# Altium PCB YoRadio108.PcbDoc
Units mm, origin at the board's own origin, x right, y up, seen from the top; angles counter-clockwise.
Board outline 153.07 x 123.13 mm, 2 copper layers (Top Layer, Bottom Layer); 46 components, 46 nets, 178 pads, 15 vias.
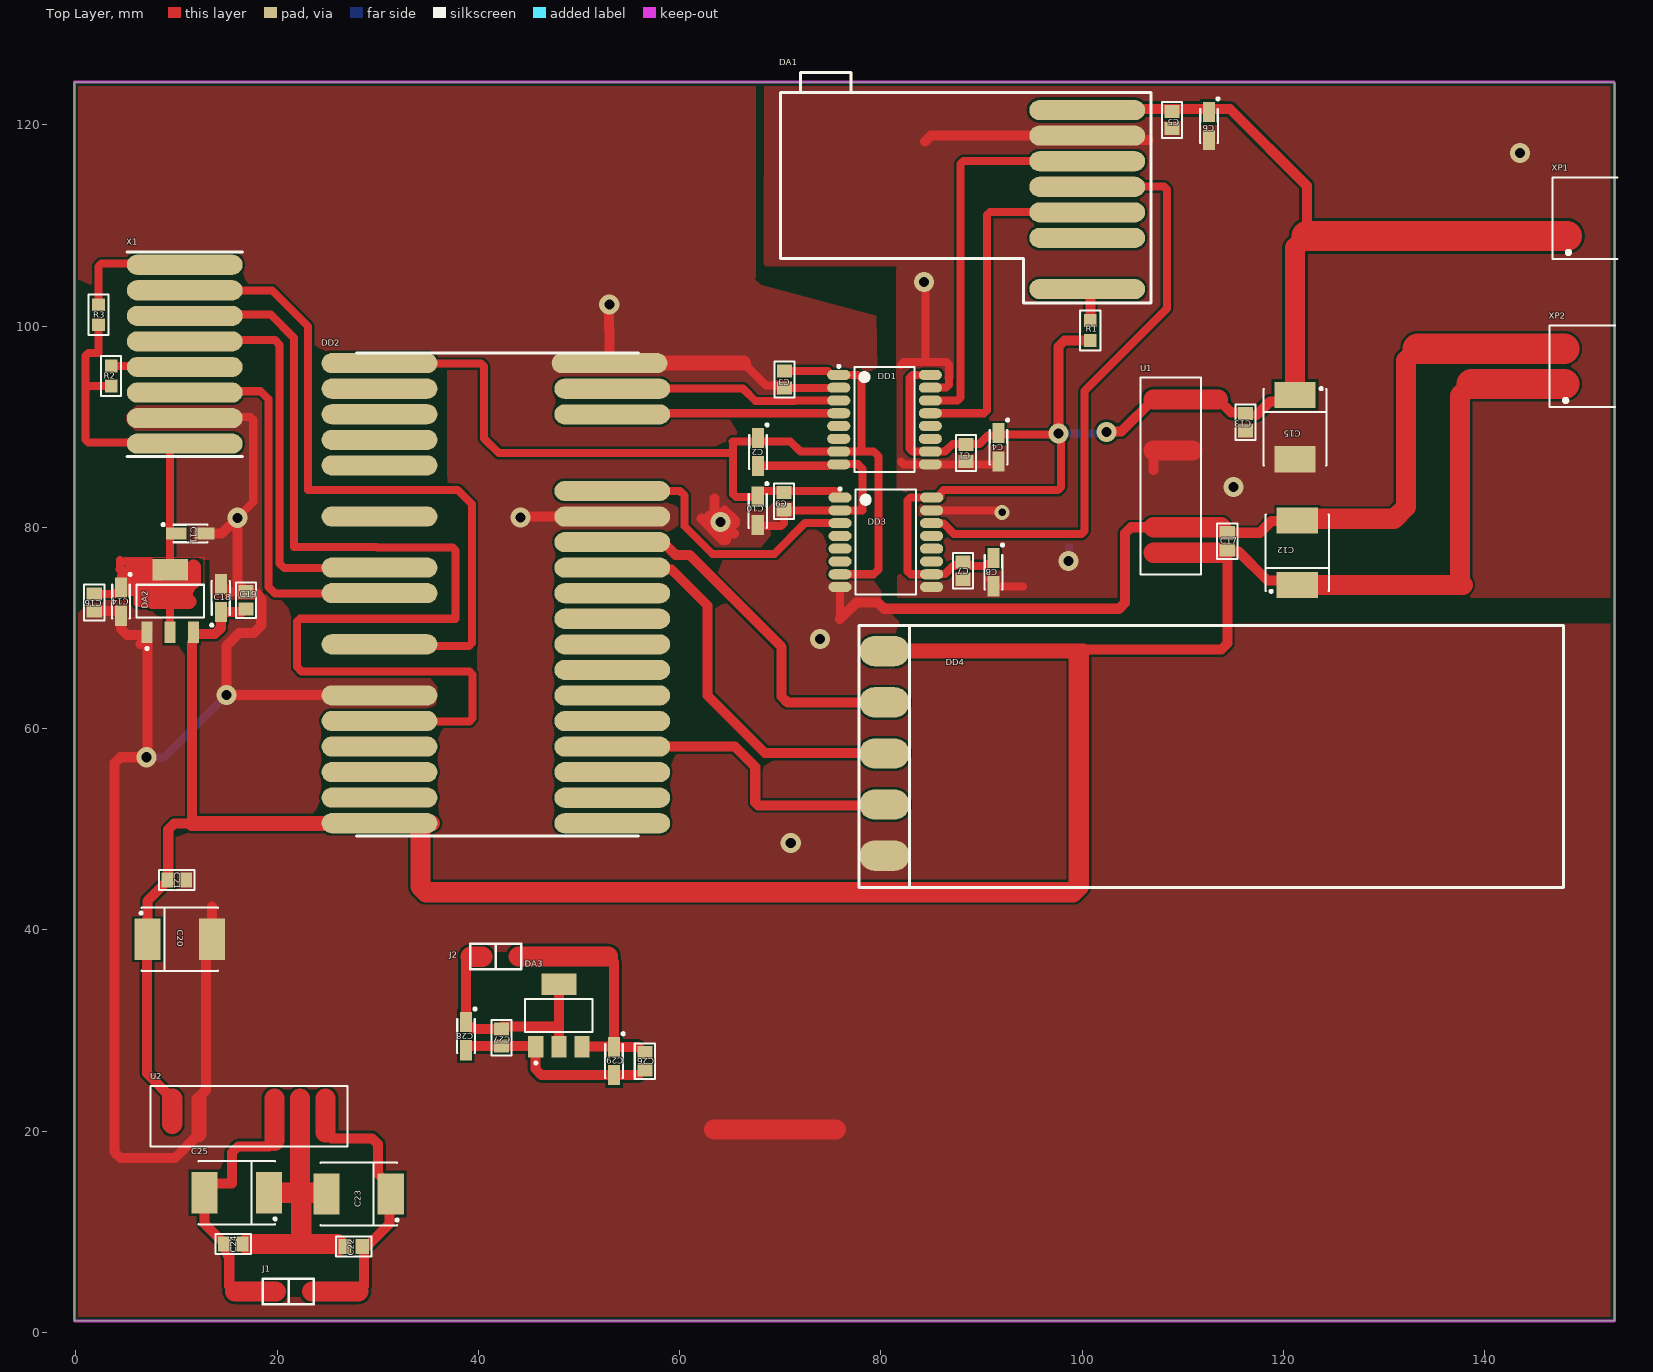
[diagram p0: Top Layer view]
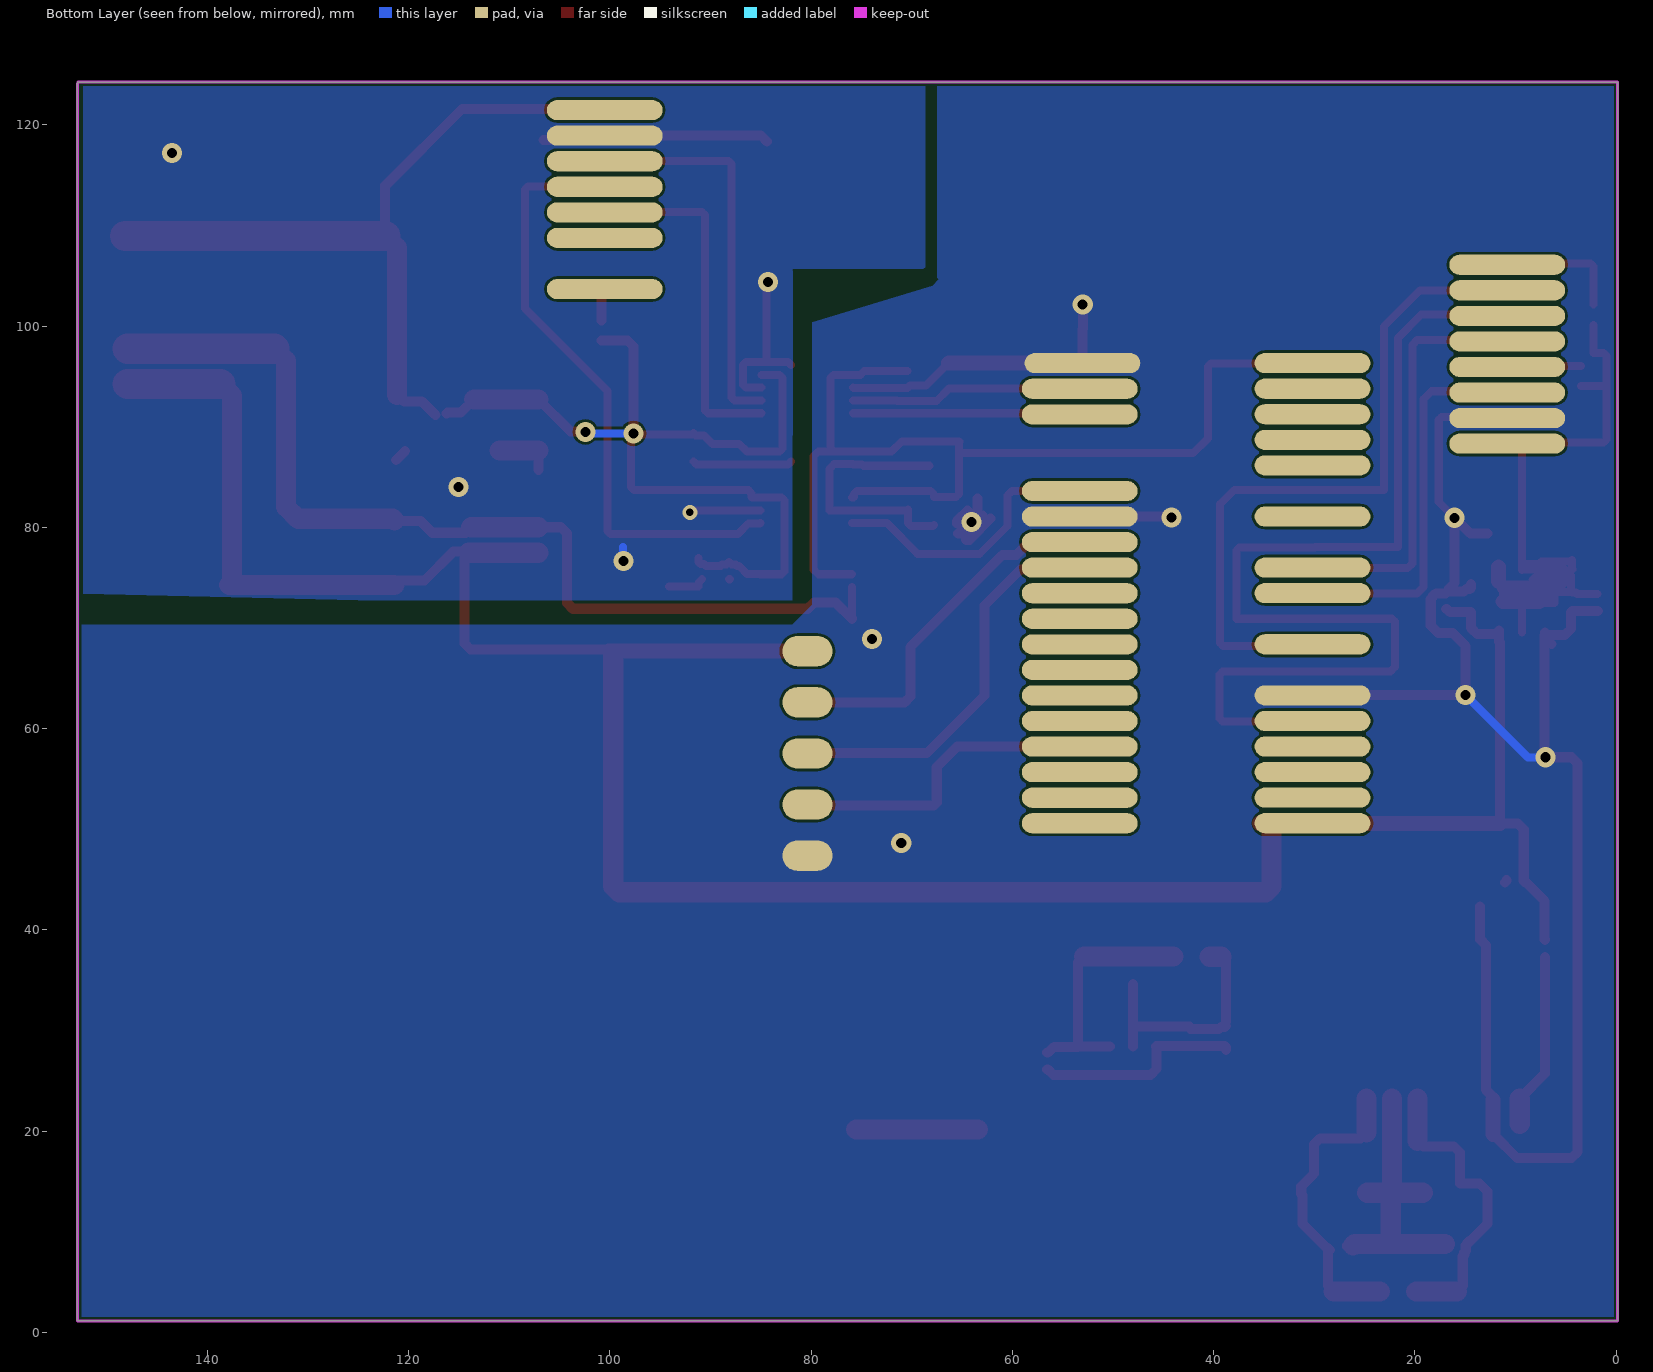
[diagram p1: Bottom Layer view, seen from below]

## Layer stack, top to bottom
Top Solder: solder mask 0.0102, Solder Resist, Dk 3.5
Top Layer: signal copper 0.0356
Dielectric 1: dielectric 0.32, FR-4, Dk 4.8
Bottom Layer: signal copper 0.0356
Bottom Solder: solder mask 0.0102, Solder Resist, Dk 3.5

## Board outline
-0.16,1.143 152.908,1.143 152.908,1.13 152.908,124.13 152.865,124.257 -0.135,124.257 -0.16,124.231

## Design rules (kind name [scope] priority, off if disabled: settings)
Clearance [All] p1: gap=0.254 ignorepadtopadclearanceinfootprint=FALSE
ComponentClearance [All] p1: gap=0 collisioncheckmode=3 verticalgap=2540 showdistances=TRUE donotcheckwithout3dbody=TRUE checkcomponentboundary=TRUE
PolygonConnect [All] p1: connectstyle=Direct reliefconductorwidth=0.254 reliefentries=4 polygonreliefangle="90 Angle" airgapwidth=0.254
RoutingCorners [All] p1: cornerstyle=90-Degree minsetback=0 maxsetback=0
RoutingVias [All] p1: holewidth=1 width=2 viastyle="Through Hole" minholewidth=0 minwidth=0 maxholewidth=20 maxwidth=20
SolderMaskExpansion [All] p1: expansion=0.102 istentingtop=FALSE
SupplyNets "Schematic Supply Nets_1" [InNet('GNDA')] p1: voltage=0.000
SupplyNets "Schematic Supply Nets" [InNet('GND')] p2: voltage=0.000
UnRoutedNet [All] p1: checkbadconnections=TRUE
UnpouredPolygon [All] p1: allowunpoured=TRUE
Width [All] p1: maxlimit=8 minlimit=0.254 preferedwidth=0.5
26 further rules are at their usual default settings.

## Components (designator, comment, footprint, x,y, rotation, side; value= is the part's Value field where it differs from the comment)
C1 "0.1uF" cap0805 88.443,87.376 r270 top
C2 "6.8uF" TC3216-1206-A 67.793,87.478 r270 top
C3 "0.1uF" cap0805 70.409,94.691 r270 top
C4 "6.8uF" TC3216-1206-A 91.694,87.96 r270 top
C5 "0.1uF" cap0805 108.941,120.472 r270 top
C6 "6.8uF" TC3216-1206-A 112.598,119.888 r270 top
C7 "0.1uF" cap0805 88.163,75.692 r270 top
C8 "6.8uF" TC3216-1206-A 91.186,75.54 r270 top
C9 "0.1uF" cap0805 70.358,82.601 r270 top
C10 "6.8uF" TC3216-1206-A 67.767,81.636 r270 top
C11 "6.8uF" TC3216-1206-A 11.379,79.375 r0 top
C12 "" TC7360-2924-E 121.387,77.47 r90 top
C13 "0.1uF" cap0805 116.23,90.449 r270 top
C14 "6.8uF" TC3216-1206-A 4.496,72.619 r270 top
C15 "100uF" TC7360-2924-E 121.158,89.967 r270 top
C16 "0.1uF" cap0805 1.829,72.542 r270 top
C17 "0.1uF" cap0805 114.427,78.613 r90 top
C18 "6.8uF" TC3216-1206-A 14.402,72.974 r90 top
C19 "*" cap0805 16.916,72.746 r90 top
C20 "" TC7360-2924-E 10.312,39.065 r0 top
C21 "0.1uF" cap0805 10.033,44.958 r0 top
C22 "0.1uF" cap0805 27.61,8.542 r180 top
C23 "100uF" TC7360-2924-E 28.092,13.749 r180 top
C24 "0.1uF" cap0805 15.646,8.771 r180 top
C25 "100uF" TC7360-2924-E 15.977,13.876 r180 top
C26 "0.1uF" cap0805 56.54,26.949 r270 top
C27 "0.1uF" cap0805 42.291,29.286 r270 top
C28 "6.8uF" TC3216-1206-A 38.76,29.439 r270 top
C29 "6.8uF" TC3216-1206-A 53.492,26.975 r270 top
DA1 "PCM5102" PCM5102 70.028,106.858 r0 top
DA2 "LM1117MP-3.3" SOT223#1 9.373,72.669 r0 top
DA3 "LM1117MP-3.3" SOT223#2 48.006,31.496 r0 top
DD1 "ADUM1402ARW" WSO-16 80.366,90.703 r0 top
DD2 "Wrover38" Wrover 28.905,96.317 r0 top
DD3 "ADUM1402ARW" WSO-16 80.493,78.511 r0 top
DD4 "RS-485" RS-485 77.826,70.231 r0 top
J1 "PLS-2" PLS-2 21.133,4.046 r270 top
J2 "PLS-2" PLS-2 41.707,37.363 r90 top
R1 "10k" res0805 100.813,99.568 r90 top
R2 "100" res0805 3.505,95.047 r90 top
R3 "100" res0805 2.235,101.127 r90 top
U1 "AM1D-0505SH30N" AM1D_3kV#1 107.086,77.47 r90 top
U2 "AM1D-0505SH30N" AM1D_3kV#2 9.576,23.223 r0 top
X1 "PBD-16" TFT 10.82,106.096 r0 top
XP1 "15EDGRC-3.5-02P" 15EDGRC-3.5-02P 154.229,114.757 r270 top
XP2 "15EDGRC-3.5-02P" 15EDGRC-3.5-02P 153.949,100.051 r270 top

## Footprints (in the part's own frame and the unit in brackets; to place one, negate y for a bottom-side part, rotate by r counter-clockwise, add the part's x,y. Pads: shape width x height; smd on the part's side, far side on the other; paste and mask are expansions set on the pad)
15EDGRC-3.5-02P [mm]
  rect 0x2 all layers, no hole: 1(5.8,-6)
  oval 0x2 all layers, no hole: 2(2.3,-6)
  silkscreen extent 0,-7.5 8.1,-1, body extent 0.15,-7.25 7.95,1.95, height 7.21
AM1D_3kV#1 [mm]
  rect 0x1.6 all layers, no hole: 1(0,0)
  oval 0x1.6 all layers, no hole: 2(2.54,0) 3(10.16,0) 4(12.7,0) 5(15.24,0)
  silkscreen extent -2.15,-4.75 17.4,1.27
AM1D_3kV#2 [mm]
  rect 0x0 all layers, no hole: 1(0,0)
  round 0 all layers, no hole: 2(2.54,0) 3(10.16,0) 4(12.7,0) 5(15.24,0)
  silkscreen extent -2.15,-4.75 17.4,1.27
cap0805 [mm]
  rect 1.3x1.5 smd: 1(-0.85,0) 2(0.85,0)
  silkscreen extent -1.78,-1 1.78,1
PCM5102 [mm]
  oval 11.5x2 all layers, no hole: 1(30.48,14.605) 2(30.48,12.065) 3(30.48,9.525) 4(30.48,6.985) 5(30.48,4.445) 6(30.48,1.905) 7(30.48,-3.175)
  silkscreen extent -0.02,-4.57 36.83,18.36
PLS-2 [mm]
  rect 0x1.6 all layers, no hole: 1(0,-1.27)
  oval 0x1.6 all layers, no hole: 2(0,1.27)
  silkscreen extent -1.27,-2.54 1.27,2.53
res0805 [mm]
  rect 1.27x1.27 smd: 1(-1,0) 2(1,0)
  silkscreen extent -2,-1 2,1
RS-485 [mm]
  oval 5x3 all layers, no hole: 1(2.54,-2.54) 2(2.54,-7.62) 3(2.54,-12.7) 4(2.54,-17.78) 5(2.54,-22.86)
  silkscreen extent 0,-26 70,0
SOT223#1 [mm] "SOT-223/SC-73; 4 Leads; Body 6.7 x 7.3 mm, inc. leads (LxW max)"
  rect 1.1x2.15 smd: 1(-2.3,-3.1) 2(0,-3.1) 3(2.3,-3.1)
  rect 3.5x2.15 smd: 4(0,3.1)
  silkscreen extent -3.35,-4.85 3.35,1.63
SOT223#2 [mm] "SOT-223/SC-73; 4 Leads; Body 6.7 x 7.3 mm, inc. leads (LxW max)"
  rect 1.5x2.15 smd: 1(-2.3,-3.1) 2(0,-3.1) 3(2.3,-3.1)
  rect 3.5x2.15 smd: 4(0,3.1)
  silkscreen extent -3.35,-4.85 3.35,1.63
TC3216-1206-A [mm] "Capacitor, SM Tantalum; Body 3.2 x 1.6 mm (LxW typ)"
  rect 2x1.2 smd: 1(-1.4,0) 2(1.4,0)
  silkscreen extent -2.82,-0.9 1.7,1.03
TC7360-2924-E [mm] "Capacitor, SM Tantalum; Body 7.3 x 6.0 mm (LxW typ)"
  rect 2.6x4.1 smd: 1(-3.2,0) 2(3.2,0)
  silkscreen extent -3.95,-3.15 3.8,3.15, body extent -3.65,-2.15 3.65,2.15, height 4.12
TFT [mm]
  oval 11.5x2 all layers, no hole: 1(0,-17.78) 3(0,-15.24) 5(0,-12.7) 7(0,-10.16) 9(0,-7.62) 11(0,-5.08) 13(0,-2.54) 15(0,0)
  silkscreen extent -5.71,-19.05 5.71,1.27
Wrover [mm]
  oval 11.5x2 all layers, no hole: 1(1.27,0) 2(1.27,-2.54) 3(1.27,-5.08) 4(1.27,-7.62) 5(1.27,-10.16) 7(1.27,-15.24) 9(1.27,-20.32) 10(1.27,-22.86) 12(1.27,-27.94) 14(1.27,-33.02) 15(1.27,-35.56) 16(1.27,-38.1) 17(1.27,-40.64) 18(1.27,-43.18) 19(1.27,-45.72) 20(24.399,-45.725) 21(24.399,-43.185) 22(24.399,-40.645) 23(24.399,-38.105) 24(24.399,-35.565) 25(24.399,-33.025) 26(24.399,-30.485) 27(24.399,-27.945) 28(24.399,-25.405) 29(24.399,-22.865) 30(24.399,-20.325) 31(24.399,-17.785) 32(24.399,-15.245) 33(24.399,-12.705) 36(24.399,-5.085) 37(24.399,-2.545) 38(24.13,0)
  oval 0x2 all layers, no hole: 6(1.27,-12.7) 8(1.27,-17.78) 11(1.27,-25.4) 13(1.27,-30.48)
  silkscreen extent -1,-47 27,1
WSO-16 [mm] "20-Pin Small Outline Integrated Circuit (SOIC20), IPC Medium Density"
  oval 2.3x1 smd: 1(-4.55,4.445) 2(-4.55,3.175) 3(-4.55,1.905) 4(-4.55,0.635) 5(-4.55,-0.635) 6(-4.55,-1.905) 7(-4.55,-3.175) 8(-4.55,-4.445) 9(4.55,-4.445) 10(4.55,-3.175) 11(4.55,-1.905) 12(4.55,-0.635) 13(4.55,0.635) 14(4.55,1.905) 15(4.55,3.175) 16(4.55,4.445)
  silkscreen extent -4.67,-5.21 3,5.42, body extent -5.31,-5.25 5.31,5.25, height 2.62

## Part data
C1 C3 C5 C7 C9 C13 C16 C17 C19 C21 C22 C24 C26 C27: library part cap0805, "Керамический конденсатор, SMD", Package="SMD 0805", Group=Конденсаторы, NPads=2, Part Number=cap0805, SType=SMD
  C16: ValueSCH=0.1uF
C2 C4 C6 C8 C10 C11 C14 C18 C28 C29: library part capA, "Танталовый конденсатор, SMD", Package="SMD A", Group=Конденсаторы, NPads=2, Part Number=capA, SType=SMD
C12 C20: library part capE, "Танталовый конденсатор, SMD", Package="SMD E", ValueSCH=100uF, Group=Конденсаторы, NPads=2, Part Number=capE, SType=SMD
C15 C23 C25: library part capE, "Танталовый конденсатор, SMD", Package="SMD E", Group=Конденсаторы, NPads=2, Part Number=capE, SType=SMD, ValueSCH=100uF
DA2 DA3: "Линейный стабилизатор 3.3V", Package=SOT223, Analog=SPX1117M3L-3.3, Group=Микросхемы, HelpURL=\DATA\LM1117.pdf, NPads=4, Part Number=LM1117MP-3.3, SType=SMD, ValueSCH=LM1117MP-3.3
DD1 DD3: "Цифровой оптрон 4 канала", Package=SO-16W, Group=Микросхемы, NPads=16, Part Number=ADUM1402ARW, SType=SMD, ValueSCH=ADUM1402ARW
J1 J2: "Однорядный штыревой разъем 2 шаг 2.54мм", Group=Разъемы, NPads=2, Part Number=PLS-2, SType=TH, ValueSCH=PLS-2
R1 R2 R3: library part res0805, "Резистор 0.125 W, SMD", Package="SMD 0805", Group=Резисторы, NPads=2, Part Number=res0805, SType=SMD
U1 U2: "Преобразователь 1Вт 5В ->5В", Package=SIP7, Group=Микросхемы, HelpURL=\DATA\AM1D.pdf, NPads=4, Part Number=AM1D-0505SH30N, SType=TH, ValueSCH=AM1D-0505SH30N
X1: "Розетка на плату 8х2 контактов.2,54 х 2,54 мм", Group=Разъемы, NPads=16, Part Number=PBD-16, SType=TH, ValueSCH=PBD-16
XP1 XP2: "Вилка на плату прямой угол 2 конт. шаг 3.5мм", Group=Разъемы, NPads=2, Part Number=15EDGRC-3.5-02P, SType=TH, ValueSCH=15EDGRC-3.5-02P

## Via types
v1: diameter 2, hole 1, Top Layer to Bottom Layer, 14 vias
v2: diameter 1.5, hole 0.75, Top Layer to Bottom Layer, 1 vias

## Nets (pads, with @x,y where several pads share a name; then routed paths per layer and width w, separated by ;. In a path a pad name is that pad's centre, name@x,y a point inside that pad or via, vN(x,y) a via of type N, cw(c..) or ccw(c..) an arc to the next point about the centre after c; other vN are vias at no path point)
3.3V: C11.1 C14.1 C16.1 DA2.2 DA2.4 R2.1 R3.1 X1.1 | length 75
  Top Layer w0.8: C16.1 3.87,73.392 3.996,73.519 4.396,73.519 4.496,73.619 C14.1 4.496,75.233 5.082,75.819 5.639,75.819 DA2.4@9.323,75.819 ; R3.1 2.235,97.317 1.258,97.317 0.965,97.024 0.965,93.777 ; R2.1 1.235,94.047 0.965,93.777 ; 4.343,75.819 4.394,75.87 4.394,76.759 4.547,76.606 7.417,76.606 7.679,76.344 8.798,76.344 DA2.4@9.323,75.819 ; C14.1@4.496,73.558 6.375,73.558 6.139,73.322 6.139,72.493 ; 6.35,72.493 7.215,72.493 7.493,72.771 7.62,72.644 ; 7.822,73.558 8.407,74.144 8.561,73.99 ; 7.976,74.676 8.661,73.99 8.763,73.889 ; DA2.2 9.373,71.907 ; 11.257,72.69 11.257,73.808 11.075,73.99 11.684,74.6 ; 0.965,93.777 0.965,88.71 1.258,88.417 9.373,88.417 DA2.4 DA2.4@9.323,75.819
  Top Layer w1.5: 5.385,74.676 7.976,74.676 ; 6.375,73.558 7.822,73.558 ; 7.62,72.644 11.257,72.644 ; 8.561,73.99 8.661,73.99 11.075,73.99 ; 11.684,74.6 11.684,76.073
3.3Vin: C2.1 C3.1 C9.1 C10.1 DD1.1 DD1.7 DD2.1 DD3.1 DD3.7 | length 100.3
  Top Layer w0.8: DD2.1@35.255,96.266 40.271,96.266 40.564,95.973 40.564,88.837 42.025,87.376 65.303,87.376 ; C10.1 65.596,83.036 65.303,83.328 65.303,87.376 ; C10.1@67.767,83.267 68.117,83.617 75.45,83.617 75.743,83.324 75.743,83.003 75.789,82.956 DD3.1 ; C3.1 74.719,95.541 75.111,95.148 77.787,95.148 78.08,94.856 78.08,87.821 77.787,87.528 ; DD3.7 79.287,75.336 79.756,75.805 79.756,87.06 79.287,87.528 78.08,87.528 77.787,87.528 ; 65.303,87.376 65.303,88.519 65.278,88.544 67.793,88.544 70.993,88.544 72.009,87.528 DD1.7 77.787,87.528
5V: C12.1 C17.1 C18.1 C19.1 C20.1 C21.1 DA2.3 DD2.19 DD4.1 U1.1 U2.1 XP2.1 | length 284.3
  Top Layer w0.8: DD2.19@33.985,50.597 DD2.19@34.239,50.343
  Top Layer w1: C20.1@7.061,37.317 7.061,25.738 U2.1 ; C20.1@7.061,39.014 C20.1 7.112,42.887 8.933,44.708 9.033,44.708 9.183,44.858 C21.1 9.183,49.972 9.769,50.557 11.557,50.557 11.557,68.536 11.623,68.602 DA2.3@11.623,69.745 ; 9.576,20.701 9.601,20.676 ; DA2.3 11.673,69.443 11.723,69.393 13.816,69.393 14.402,69.979 C18.1 16.495,71.574 16.816,71.896 C19.1 ; 99.67,67.283 100.255,67.869 113.841,67.869 114.427,68.455 C17.1 ; C17.1@114.034,77.47 114.327,77.763 C17.1 ; C12.1 120.937,74.719 118.422,74.719 115.529,77.613 114.577,77.613 C17.1
  Top Layer w1.5: 11.557,50.557 30.299,50.557 30.334,50.592 DD2.19@30.337,50.589 ; DD2.19@30.345,50.597 33.985,50.597 DD2.19@35.425,50.597 ; DD4.1 100.078,67.691
  Top Layer w2: 9.576,20.701 U2.1 ; DD2.19@34.239,50.343 34.239,44.325 34.825,43.739 99.084,43.739 99.67,44.325 99.67,67.283 ; U1.1 C17.1@114.034,77.47 ; C12.1 137.82,74.27 137.541,74.549 137.541,93.079 138.713,94.251
  Top Layer w3: 138.713,94.251 XP2.1
5VA: C1.1 C4.1 C5.1 C6.1 C7.1 C8.1 C13.1 C15.1 DA1.1 DD1.10 DD1.16 DD3.10 DD3.16 R1.1 U1.5 XP1.1 | length 174.3
  Top Layer w0.8: DD1.16 83.122,95.148 82.829,94.856 82.829,87.821 83.122,87.528 DD1.10 86.385,87.528 87.147,88.29 88.443,88.29 89.789,88.29 90.637,89.138 91.472,89.138 C4.1 91.821,89.233 97.663,89.233 97.889,89.233 97.889,83.986 97.596,83.693 86.227,83.693 85.912,83.378 85.912,83.003 85.866,82.956 DD3.16 85.023,82.976 84.103,82.976 84.096,82.982 82.944,82.982 82.652,82.689 82.652,75.629 82.944,75.336 DD3.10 85.081,75.375 86.371,75.375 87.143,76.146 87.345,76.146 87.491,76.292 87.913,76.292 C7.1 88.413,76.292 88.836,76.292 88.982,76.146 90.44,76.146 90.634,76.34 90.986,76.34 91.186,76.54 C8.1
  Top Layer w1: v1(97.663,89.332) 97.663,97.982 98.249,98.568 R1.1 ; DA1.1@99.008,121.481 99.108,121.581 114.705,121.581 122.33,113.956 122.33,108.966 ; v1(102.438,89.484) 102.495,89.541 103.917,89.541 U1.5 ; 113.513,92.71 114.816,91.406 116.123,91.406 C13.1 ; 117.348,91.186 118.651,92.489 120.48,92.489 C15.1
  Top Layer w2: U1.5 113.513,92.71 ; C15.1 121.158,107.794 122.33,108.966 ; 148.195,108.966 148.203,108.957
  Top Layer w3: 122.33,108.966 148.195,108.966
  Bottom Layer w0.8: v1(97.663,89.332) 102.286,89.332 v1(102.438,89.484)
+U1: C22.1 C23.1 J1.2 U2.5 | length 30.2
  Top Layer w1: 24.816,19.864 25.402,19.279 29.437,19.279 30.023,18.693 30.023,15.769 31.292,14.499 C23.1 31.16,13.616 31.16,10.785 28.71,8.335 C22.1@28.61,8.335 ; 28.065,4.046 28.651,4.632 28.651,7.993 C22.1@28.46,8.185
  Top Layer w2: 23.47,4.046 28.065,4.046 ; 24.816,19.864 U2.5
+U2: C26.1 C29.1 DA3.3 J2.1 | length 24.5
  Top Layer w1: DA3.3 53.471,28.396 53.471,36.778 52.885,37.363 ; C29.1 55.865,28.375 56.44,27.799 C26.1
  Top Layer w2: 44.018,37.363 52.885,37.363
+U3: C27.1 C28.1 DA3.2 DA3.4 J2.2 | length 23.4
  Top Layer w1: C28.1@38.76,30.439 38.86,30.339 39.26,30.339 39.463,30.136 C27.1 ; C28.1 38.76,36.854 39.227,37.32 ; C27.1@42.393,30.392 47.893,30.392 48.006,30.505 ; DA3.2 48.006,30.505 ; DA3.4 48.006,30.505
  Top Layer w2: 39.227,37.32 40.394,37.32
-U1: C24.2 C25.2 J1.1 U2.3 | length 30.4
  Top Layer w1: 15.826,4.046 15.24,4.632 15.24,7.561 15.092,7.708 15.092,7.935 14.946,8.081 14.946,8.621 C24.2 14.796,8.871 14.646,9.021 14.546,9.021 12.777,10.79 12.777,13.988 13.577,14.788 15.524,14.788 15.524,17.88 16.11,18.466 19.202,18.466 19.736,18.999
  Top Layer w2: 15.826,4.046 J1.1 ; 19.736,18.999 U2.3
B_CLK: DA1.5 DD1.13 | length 33.7
  Top Layer w0.8: DD1.13 90.258,91.338 90.551,91.631 90.551,111.028 90.844,111.321 DA1.5@99.008,111.321
BCLK: DD1.4 DD2.36 | length 17.4
  Top Layer w0.8: DD2.36@58.395,91.338 DD1.4
CMD: DD2.18
CS: DD2.10 X1.5 | length 28.9
  Top Layer w0.8: X1.5@15.74,93.523 18.364,93.523 19.152,92.735 19.152,74.066 19.787,73.431 25.298,73.431 DD2.10@25.324,73.406
D_OUT: DA1.4 DD3.14 | length 62.6
  Top Layer w0.8: DD3.14 85.081,80.378 86.246,80.378 87.274,79.35 99.936,79.35 100.228,79.642 100.228,93.548 108.429,101.748 108.429,113.568 108.136,113.861 DA1.4@99.008,113.861
DC: DD2.9 X1.9 | length 31.6
  Top Layer w0.8: X1.9@15.867,98.603 19.775,98.603 20.244,98.134 20.244,76.415 20.712,75.946 DD2.9@25.324,75.946
Dir: DD2.23 DD4.4 | length 28.2
  Top Layer w1: DD2.23@56.693,58.217 65.486,58.217 67.513,56.189 67.513,52.668 67.806,52.375 80.289,52.375 DD4.4
DOUT: DD2.33 DD3.3 | length 23.7
  Top Layer w0.8: DD2.33@57.836,83.617 60.034,83.617 60.503,83.148 60.503,80.112 63.246,77.368 69.418,77.368 72.466,80.416 DD3.3
EN: DD2.2
G0: DD2.25
G2: DD2.24
G5: DD2.29
G12: DD2.13
G27: DD2.11
G32: DD2.7
G33: DD2.8
G34: DD2.5
G35: DD2.6
GND: C2.2 C3.2 C9.2 C10.2 C11.2 C12.2 C14.2 C16.2 C17.2 C18.2 C19.2 C20.2 C21.2 DA2.1 DD1.2 DD1.8 DD2.14 DD2.32 DD2.38 DD3.2 DD3.8 DD4.5 U1.2 U2.2 X1.3 XP2.2 | length 350.5
  Top Layer w0.8: X1.3@15.74,90.983 17.335,90.983 17.628,90.69 17.628,82.525 v1(16.053,80.95) ; DD2.14@25.24,63.322 DD2.14@25.265,63.297 ; 66.345,96.317 68.57,94.091 70.196,94.091 70.427,93.86 75.797,93.86 DD1.2 ; C10.2 67.891,80.112 70.065,80.112 70.358,80.404 C9.2 70.422,81.686 DD3.2 78.181,81.686 78.181,85.809 77.713,86.278 75.835,86.278 DD1.8 74.939,86.258 74.8,86.12 C2.2@68.224,86.12 ; 75.943,70.913 DD3.8
  Top Layer w1: C16.2 4.396,71.692 4.496,71.592 C14.2 4.496,69.904 5.082,69.318 DA2.1@7.073,69.318 ; 6.426,68.402 6.426,68.409 7.012,68.994 7.023,68.994 7.073,69.044 DA2.1@7.073,69.318 ; DA2.1 DA2.1@7.073,69.318 ; C21.2 10.883,44.858 C21.2@11.033,44.708 ; 12.217,19.689 9.845,17.317 4.431,17.317 3.845,17.903 3.845,56.564 4.431,57.15 v1(7.036,57.15) 7.112,57.226 7.112,69.318 DA2.1@7.073,69.318 ; 12.217,23.122 U2.2 12.116,23.272 12.952,24.109 12.952,38.505 C20.2 13.512,42.277 13.538,42.303 ; C11.2 12.79,79.386 14.489,79.386 v1(16.053,80.95) 16.053,74.459 16.666,73.846 16.666,73.746 16.966,73.446 17.917,73.446 18.263,73.1 18.263,73.016 18.42,72.858 18.42,70.238 17.677,69.494 16.231,69.494 14.961,68.224 v1(14.961,63.322) DD2.14@25.24,63.322 ; C18.2 14.402,73.974 14.502,73.874 14.902,73.874 15.141,73.635 C19.2@16.666,73.635 ; v1(44.196,80.975) 44.292,81.071 DD2.32 ; v1(53.01,102.133) 52.981,102.104 52.981,99.756 53.035,99.701 DD2.38 ; 62.179,80.874 64.287,78.765 64.592,78.765 62.963,80.394 62.963,81.176 ; 63.156,81.176 63.788,80.543 v1(64.059,80.543) 65.227,79.375 65.405,79.375 ; 63.475,82.88 63.475,81.398 64.482,80.391 65.481,80.391 65.481,80.645 64.465,81.661 ; 75.943,70.913 77.546,72.517 79.722,72.517 80.331,71.907 103.681,71.907 104.267,72.493 104.267,79.424 104.853,80.01 U1.2 ; C17.2@113.78,80.01 114.327,79.463 C17.2 117.665,79.463 118.847,80.645 121.362,80.645 C12.2
  Top Layer w1.5: 12.217,19.689 12.217,23.122 ; DD2.14@25.265,63.297 DD2.14 DD2.14@30.345,63.297 ; DD2.38@57.175,96.317 66.345,96.317
  Top Layer w2: 63.398,20.142 75.514,20.142 ; U1.2 C17.2@113.78,80.01 ; C12.2 121.565,80.848 131.01,80.848 132.182,82.02 132.182,96.579 133.353,97.751
  Top Layer w3: 133.353,97.751 XP2.2
  Bottom Layer w0.8: v1(7.036,57.15) 7.061,57.125 8.763,57.125 v1(14.961,63.322)
  other v1: 71.044,48.619 73.939,68.91
GND1: C22.2 C23.2 C24.1 C25.1 U2.4 | length 30.4
  Top Layer w1: 22.098,13.876 22.276,14.054 22.403,13.927 ; C23.2@24.765,13.876 C23.2 ; C22.2@26.162,8.621 26.76,8.621 C22.2
  Top Layer w2: C24.1@16.993,8.771 22.403,8.771 ; C25.1 22.098,13.876 22.403,13.876 ; 22.276,14.054 U2.4 ; 22.403,13.927 22.403,13.876 ; C23.2@24.765,13.876 22.403,13.876 ; C22.2@26.162,8.621 26.012,8.771 22.403,8.771 ; 22.403,8.771 22.403,13.876
GNDA: C1.2 C4.2 C5.2 C6.2 C7.2 C8.2 C13.2 C15.2 DA1.2 DD1.9 DD1.15 DD3.9 DD3.15 U1.3 XP1.2 | length 69
  Top Layer w0.8: 81.991,86.551 82.284,86.258 DD1.9 91.392,86.258 C4.2 ; 81.991,96.126 82.284,96.418 84.423,96.418 ; v1@84.404,104.445 84.423,104.426 84.423,96.418 ; DD1.15 86.474,93.878 86.766,94.171 86.766,96.126 86.474,96.418 84.423,96.418 ; DD3.15 91.576,81.686 91.779,81.483 v2(92.05,81.483) ; C7.2@88.063,74.842 C7.2 ; C8.2@90.836,74.842 91.186,74.492 C8.2 94.129,74.14
  Top Layer w1: 84.404,118.355 84.99,118.941 99.008,118.941 102.786,118.941 103.239,118.488 106.604,118.488 ; 107.086,85.7 U1.3 ; C15.2@120.358,87.567 C15.2 C15.2@121.235,86.69
  Top Layer w2: U1.3 110.973,87.63
  Bottom Layer w0.8: v1(98.654,76.657) 98.718,76.722 98.718,78.068
  other v1: 115.037,84.023 84.303,104.394 143.51,117.196
L_RC: DA1.3 DD1.14 | length 37.5
  Top Layer w0.8: DD1.14 87.617,92.608 87.909,92.901 87.909,116.108 88.202,116.401 DA1.3@99.008,116.401
LRC: DD1.3 DD2.37 | length 19.6
  Top Layer w0.8: DD2.37@56.769,93.802 66.294,93.802 67.559,92.537 71.43,92.537 71.501,92.608 DD1.3
MOSI: DD2.15 X1.11 | length 97.2
  Top Layer w0.8: X1.11@15.867,101.143 19.367,101.143 21.692,98.818 21.692,78.054 29.856,78.054 29.903,78.007 37.452,78.007 37.744,77.715 37.744,70.917 22.289,70.917 21.996,70.624 21.996,66.104 22.416,65.684 39.103,65.684 39.395,65.392 39.395,60.999 39.103,60.706 DD2.15@35.306,60.706
NetC26_2: C26.2 C27.2 C28.2 C29.2 DA3.1 | length 20.9
  Top Layer w1: C28.2 38.76,28.336 38.86,28.436 C27.2 45.666,28.436 DA3.1 45.669,28.359 45.669,26.161 46.255,25.575 C29.2 55.916,25.575 56.44,26.099 C26.2
NetDA1_7: DA1.7 R1.2 | length 3.2
  Top Layer w0.8: DA1.7 DA1.7@100.813,103.378
  Top Layer w1: R1.2 DA1.7@100.813,103.378
NetR2_2: R2.2 X1.7 | length 2.8
  Top Layer w0.8: R2.2 5.945,96.047 X1.7@6.215,96.317
NetR3_2: R3.2 X1.15 | length 7.6
  Top Layer w0.8: R3.2 2.235,105.93 2.528,106.223 X1.15@5.951,106.223
RX2: DD2.30 DD4.3 | length 39.9
  Top Layer w1: DD2.30 53.495,75.8 59.201,75.8 62.763,72.238 62.763,63.298 68.48,57.582 DD4.3@80.366,57.582
SCK: DD2.12 X1.13 | length 59.5
  Top Layer w0.8: X1.13@15.867,103.556 19.494,103.556 23.089,99.961 23.089,83.718 30.754,83.718 31.09,83.718 37.948,83.718 39.345,82.321 39.345,68.517 39.052,68.224 35.662,68.224 DD2.12@35.56,68.326
SD0: DD2.21
SD1: DD2.22
SD2: DD2.16
SD3: DD2.17
SLK: DD2.20
SN: DD2.4
SP: DD2.3
TX2: DD2.31 DD4.2 | length 31.7
  Top Layer w1: DD2.31@58.115,78.537 58.319,78.537 59.611,77.245 61,77.245 70.121,68.125 70.121,63.197 70.706,62.611 DD4.2
pads on no net: DA1.6 DD1.5 DD1.6 DD1.11 DD1.12 DD2.26 DD2.27 DD2.28 DD3.4 DD3.5 DD3.6 DD3.11 DD3.12 DD3.13 U1.4

## Polygon pours and split planes (outlines as drawn)
GND on Top Layer "GND_L01_P002" (solid, remove dead copper, pour order 2): -1.626,125.374 67.589,125.374 67.589,104.877 67.437,104.724 68.047,104.115 79.527,101.041 80.035,72.39 82.017,70.409 153.058,70.409 153.643,0.584 122.53,0.584 -1.092,0.584
GNDA on Top Layer "GNDA_L01_P004" (solid, remove dead copper, pour order 4): 68.402,124.155 152.588,124.13 153.049,73 124.741,73 81.61,73 81.534,105.766 81.61,105.842 81.509,105.943 68.377,105.943
GND on Top Layer "GND_L01_P006" (solid, pour order 6): 4.115,77.165 4.115,73 4.14,72.974 4.166,73 5.639,73 5.639,71.603 5.893,71.349 12.751,71.349 12.751,76.987 12.7,77.038
3.3V on Top Layer "3.3V_L01_P000" (solid, remove dead copper, pour order 0): 4.928,77.089 4.978,77.038 12.7,77.038 12.7,70.942 12.675,70.968 4.877,70.968
GND on Bottom Layer "GND_L02_P003" (solid, remove dead copper, pour order 3): -1.753,125.285 67.462,125.285 67.462,104.788 67.31,104.635 67.92,104.026 79.908,100.406 79.908,72.301 81.89,70.32 152.865,70.32 152.563,0.495 122.403,0.495 -1.219,0.495
GNDA on Bottom Layer "GNDA_L02_P005" (solid, remove dead copper, pour order 5): 68.682,123.901 152.359,123.901 152.359,73.406 125.021,72.746 81.89,72.746 81.813,105.512 81.89,105.588 81.788,105.689 68.656,105.689

## Keep-outs
Keep-Out Layer:
  lines w0.3: -0.16,124.231 -0.16,1.143 152.908,1.143 ; -0.135,124.257 152.865,124.257 ; 152.908,1.13 152.908,124.13

## Other copper
Top Layer:
  pour cut-out: 83.59,75.996 83.311,75.996 83.311,82.322 83.981,82.322 83.724,82.066 83.724,76.25
  pour cut-out: 83.489,94.489 83.489,93.252 87.004,93.252 87.071,93.32 87.071,94.64
  pour cut-out: 65.963,87.082 65.963,84.893 66.566,84.29 68.097,84.29 68.097,86.689 68.326,86.919
  pour cut-out: 12.131,71.731 12.131,73.543 12.022,73.653 12.765,74.397 12.878,74.397 12.878,76.581 12.725,76.733 12.751,76.759 13.31,76.759 13.31,73.066 13.548,72.828 12.424,71.704 12.421,71.704
  pour cut-out: 10.032,71.631 10.032,71.349 12.751,71.349 12.624,71.476 12.624,71.755
  pour cut-out: 8.713,71.349 7.823,71.349 7.672,71.5 7.672,71.631 8.713,71.631
  pour cut-out: 77.709,76.393 77.709,81.108 77.461,81.356 79.883,81.356 79.883,76.925 79.956,76.852
  pour cut-out: 82.08,75.299 82.043,75.336 81.534,75.336 81.534,83.617 81.483,83.668 81.509,83.693 82.245,83.693
  pour cut-out: 1.479,93.006 1.479,88.931 3.892,88.931 4.998,90.037 4.998,92.73
  pour cut-out: 71.841,94.322 71.841,93.671 72.39,93.122 73.535,94.267 73.547,94.267 73.547,94.507 73.472,94.583
  pour cut-out: 68.885,80.315 69.038,80.161 69.038,79.384 70.181,79.384 70.303,79.263 70.587,79.547 70.587,80.797
  pour cut-out: 68.647,87.332 68.647,85.262 75.419,85.262 78.003,82.677 78.765,83.439 79.705,83.439 79.705,86.777 79.779,86.851
  pour cut-out: 72.332,83.103 72.199,82.971 72.199,81.096 73.601,81.096 73.691,81.006 74.422,81.737 74.422,82.855 74.27,83.007
  pour cut-out: 86.411,88.367 86.203,88.575 86.203,90.825 90.471,90.825 90.621,90.975 90.84,90.757 90.84,89.652
  pour cut-out: 21.522,70.821 21.488,70.854 21.488,72.923 23.588,72.923 23.594,72.918
  pour cut-out: 36.929,95.752 36.929,84.407 37.104,84.232 36.202,84.232 36.202,84.575 35.865,84.912 35.88,84.928 35.88,85.537 36.424,86.081 36.153,86.351 36.153,86.896 35.891,87.158 35.891,88.03 36.153,88.292 36.153,89.221 35.865,89.51 35.865,90.209 35.891,90.235
  pour cut-out: 36.517,67.711 39.884,67.711 39.903,67.691 39.87,67.658 39.87,65.588 39.26,66.198 36.687,66.198 36.687,66.361 36.198,66.85 36.198,67.398 36.204,67.398 36.556,67.75 39.248,67.75
  pour cut-out: 36.237,65.143 36.265,65.171 38.882,65.171 38.882,61.22 36.868,61.22 36.868,61.395 35.91,62.353 36.171,62.615 36.171,63.541 35.924,63.789 35.924,63.971
  region: 13.538,42.303
  region: 13.538,42.303
  region: 13.538,42.303